# Altium PCB Glove_PCB.PcbDoc
Units mm, origin at the board's own origin, x right, y up, seen from the top; angles counter-clockwise.
Board outline 43.05 x 40.51 mm, 2 copper layers (Top Layer, Bottom Layer); 29 components, 26 nets, 123 pads, 53 vias.
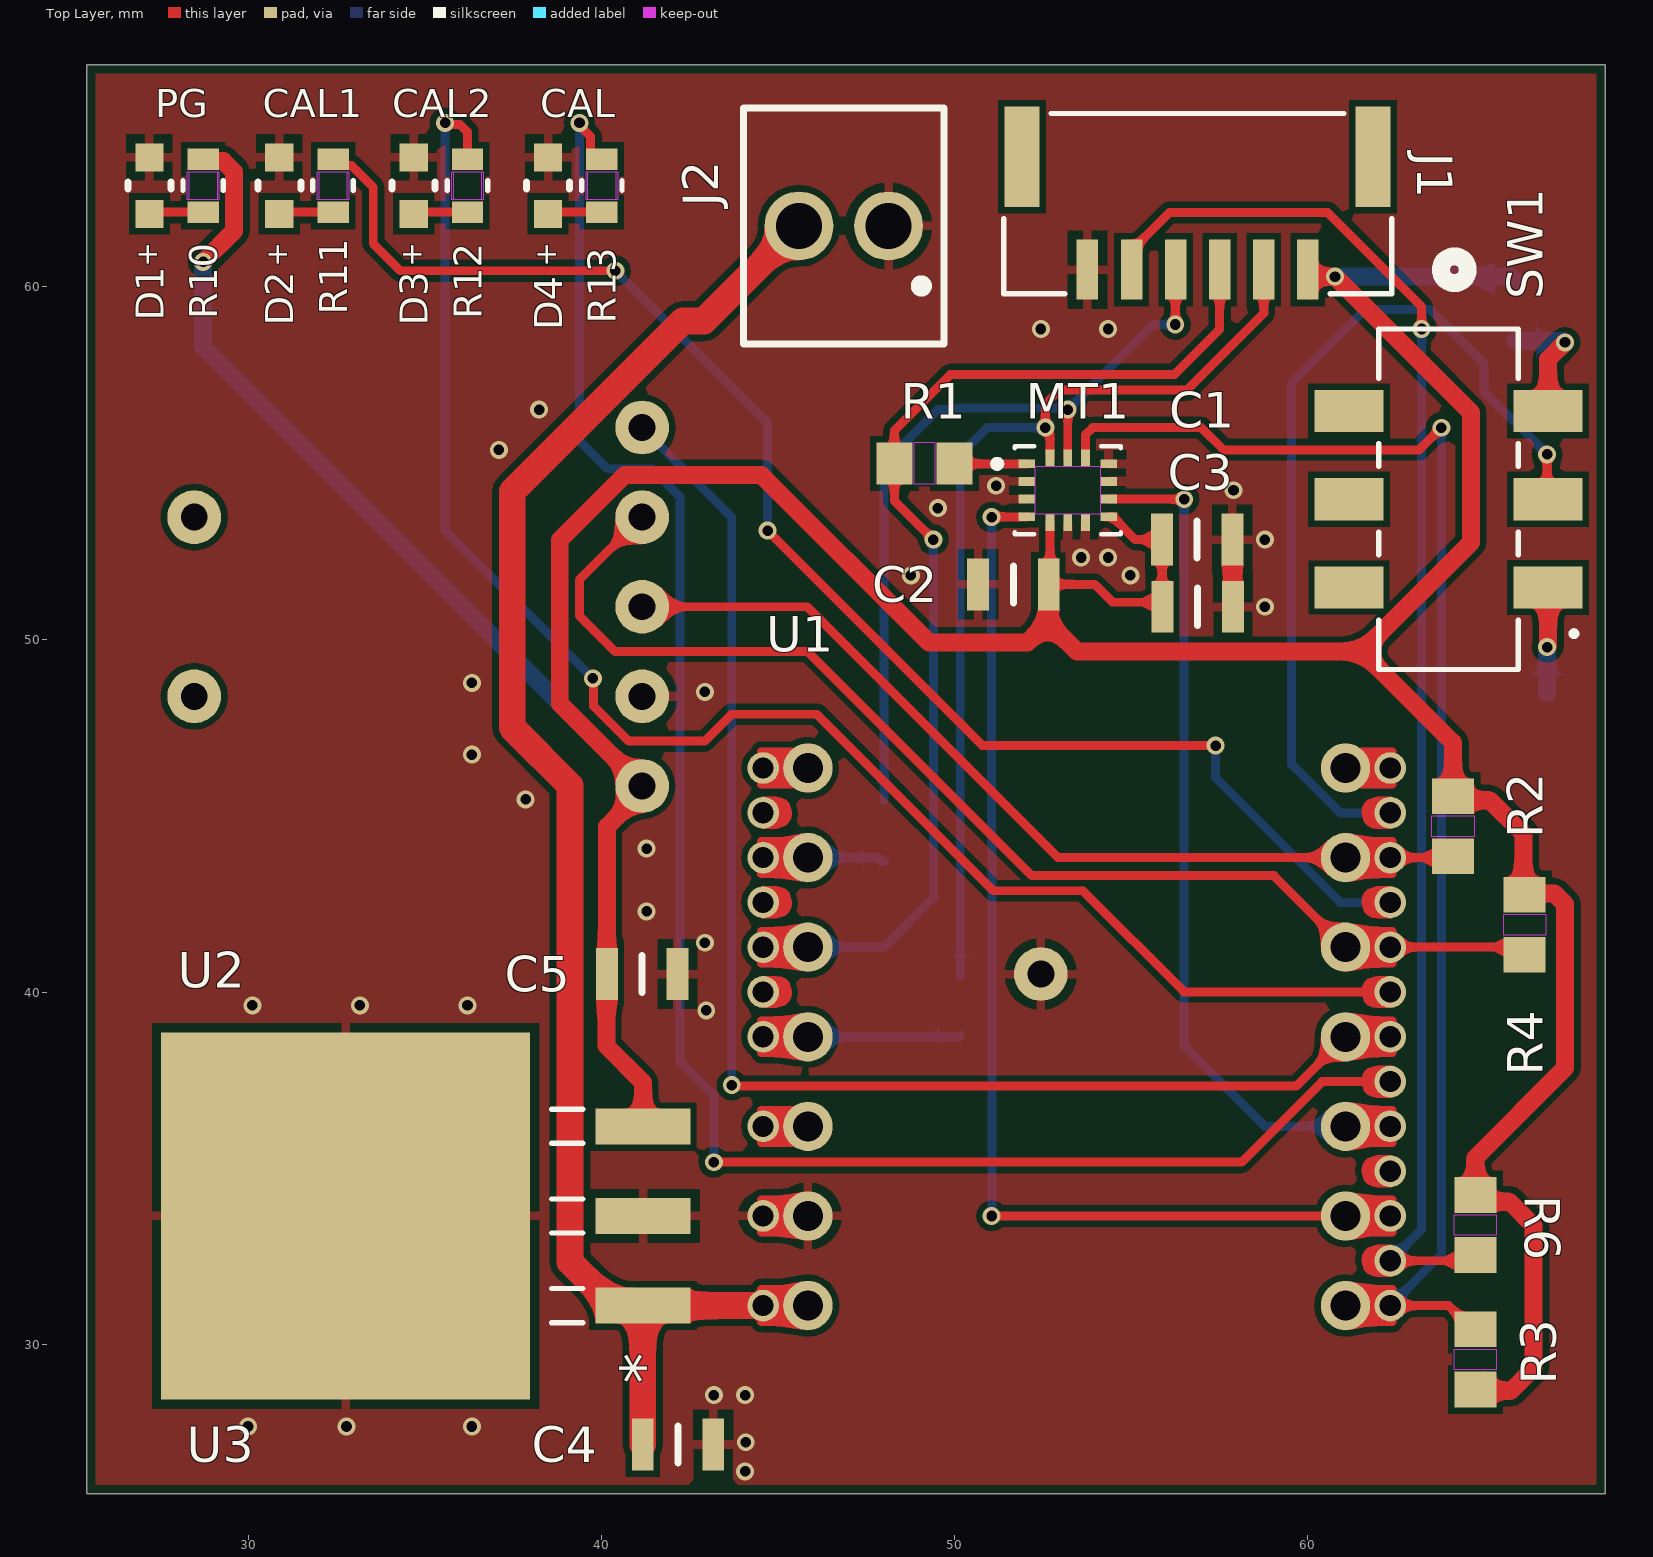
[diagram p0: Top Layer view]
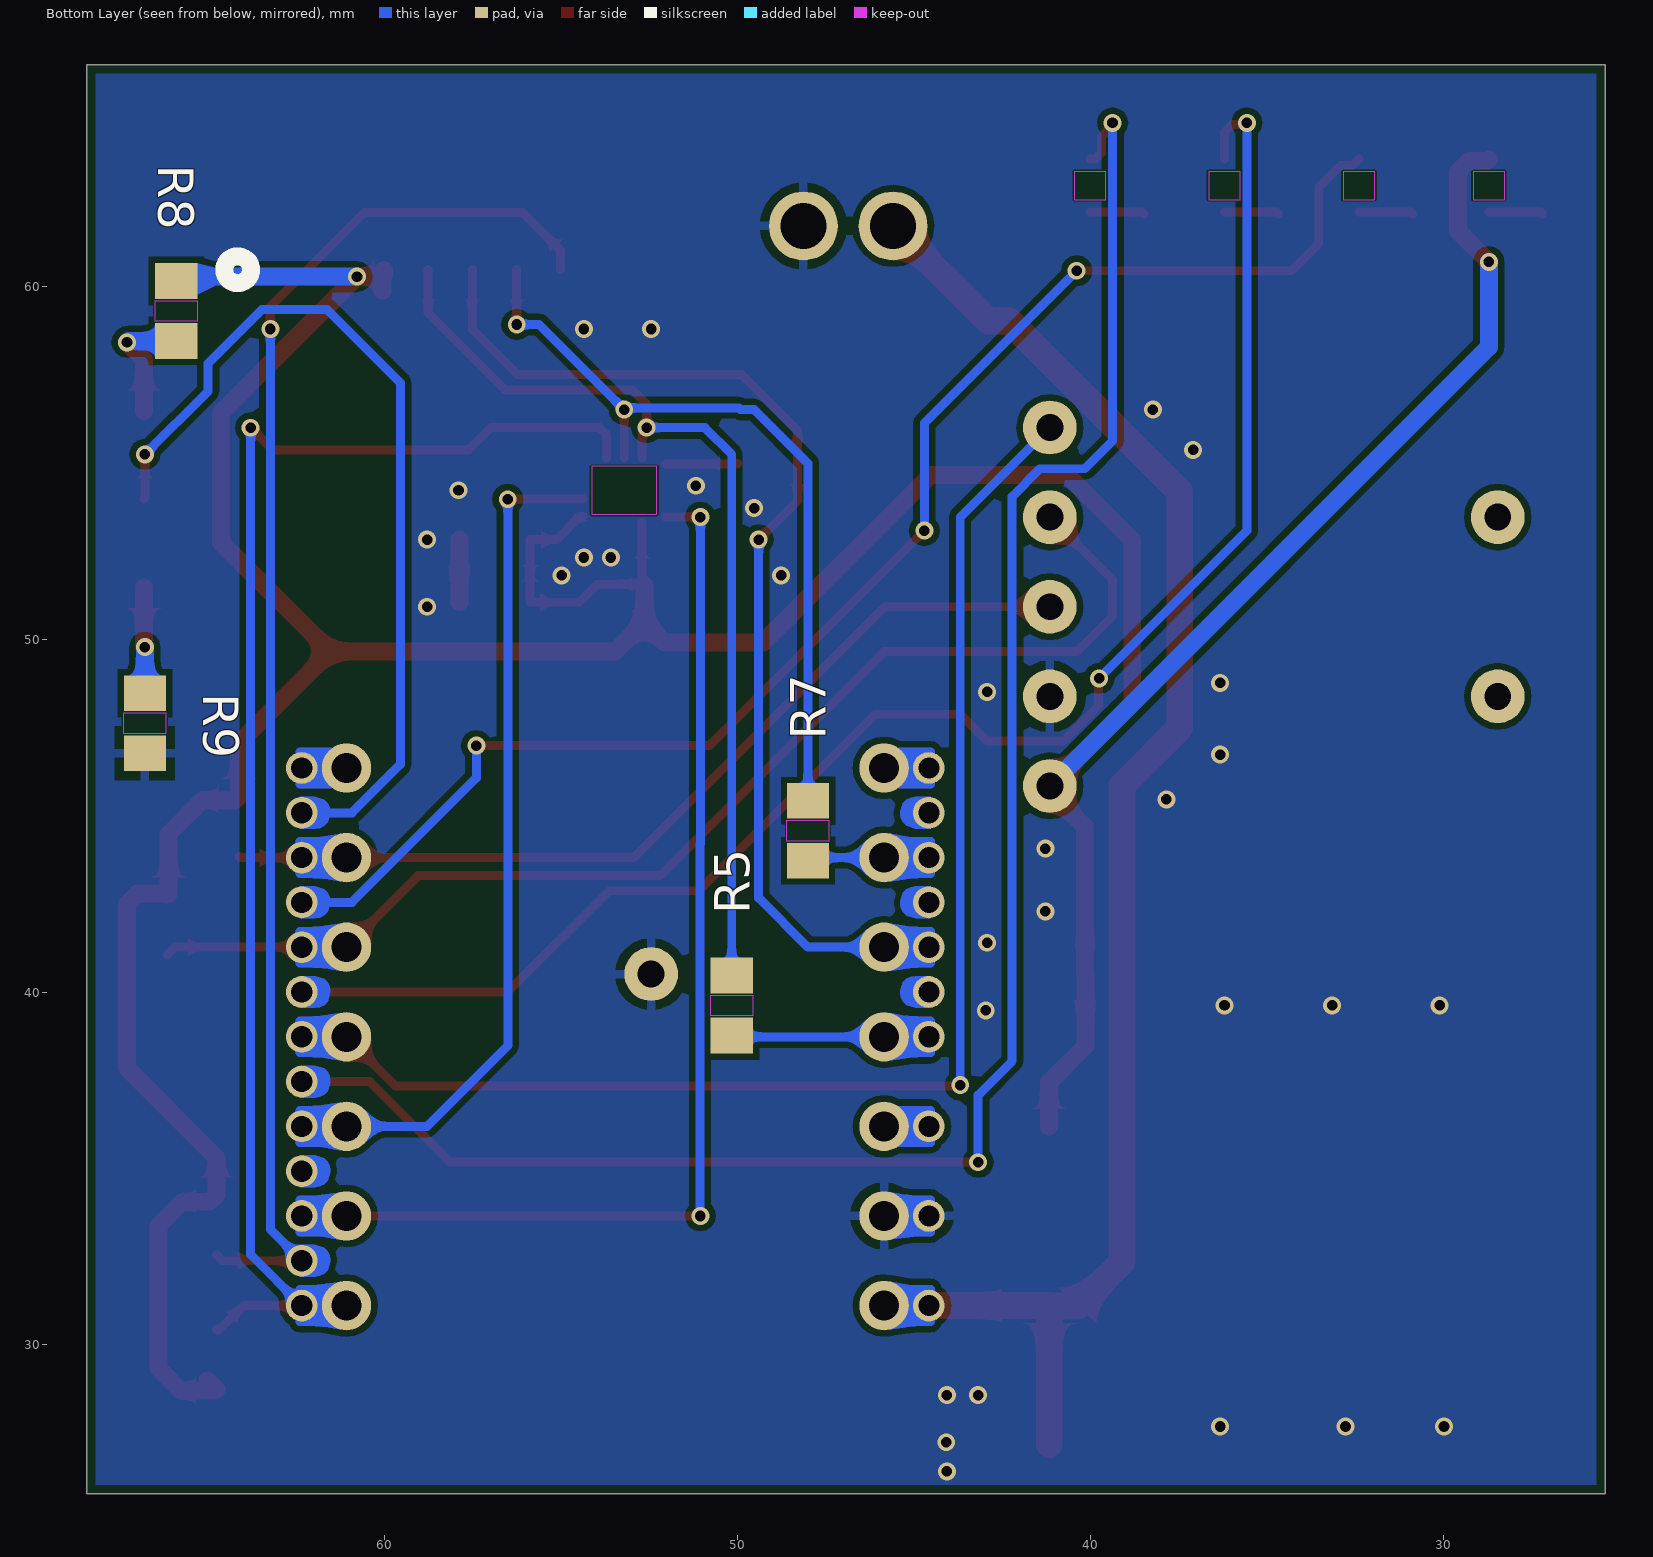
[diagram p1: Bottom Layer view, seen from below]
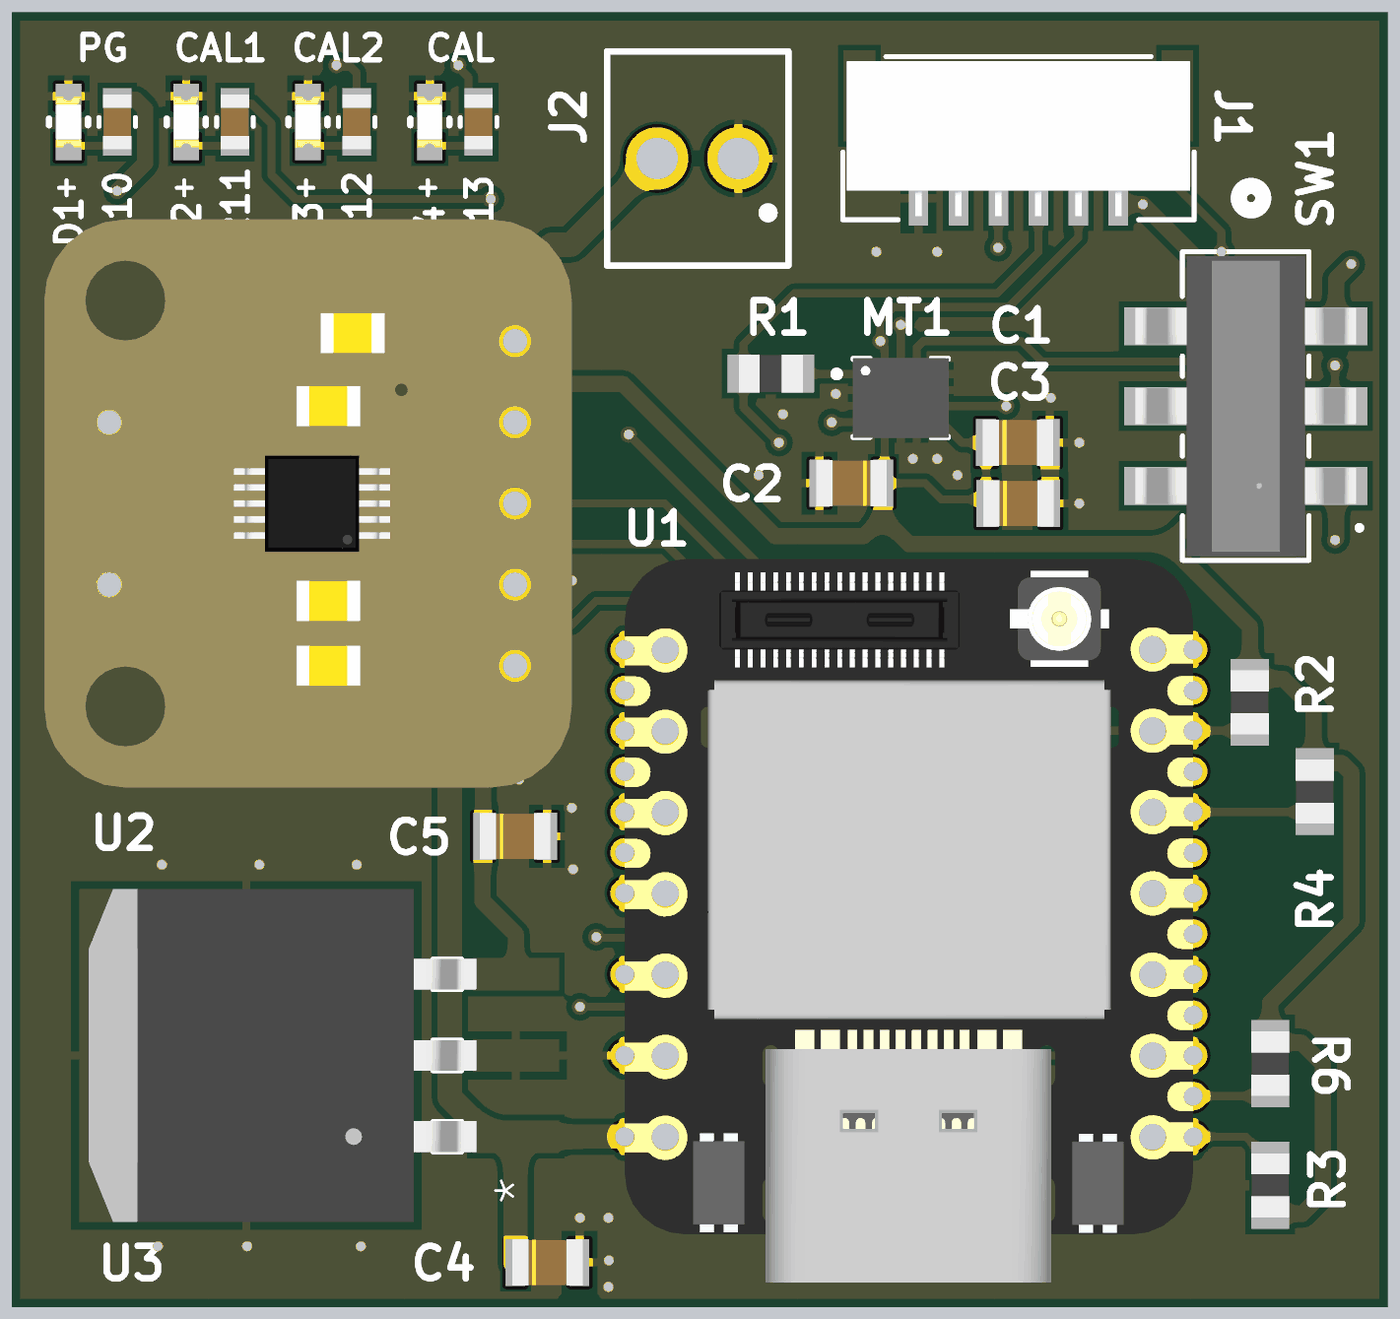
[diagram p2: 3D render of the assembled board from above, using the file's embedded part models]
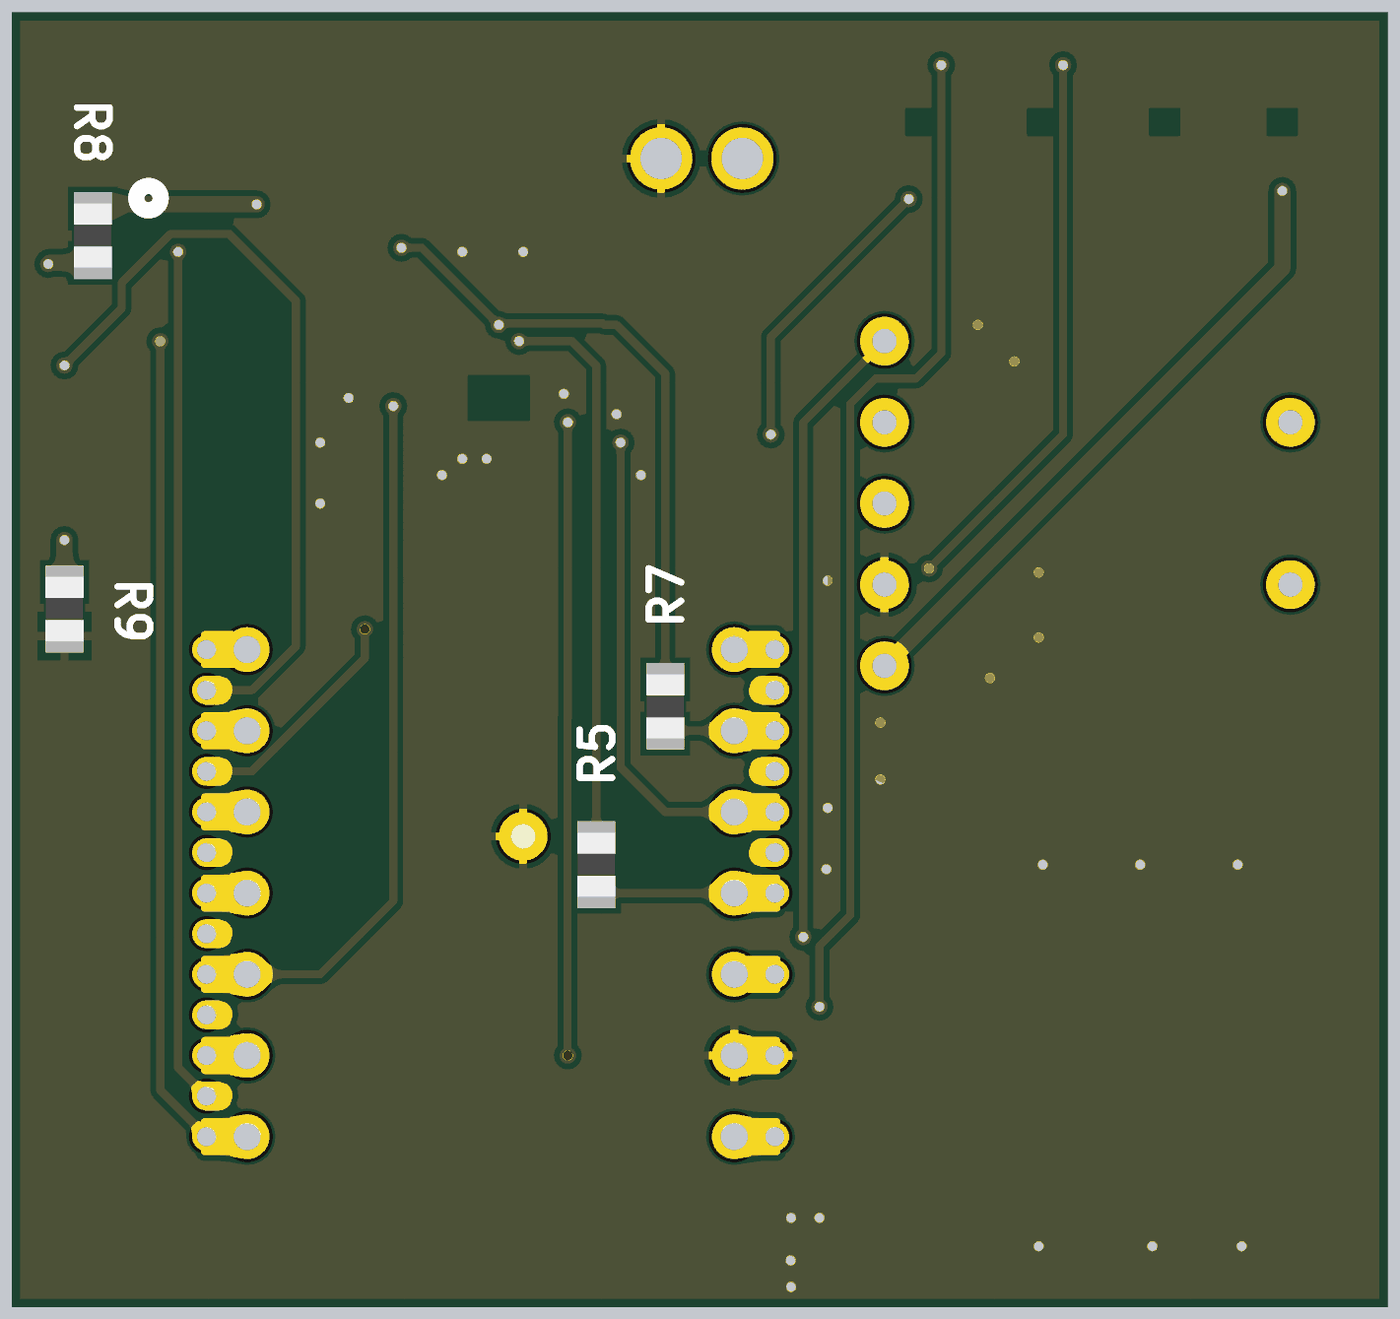
[diagram p3: 3D render of the assembled board from below, using the file's embedded part models]

## Layer stack, top to bottom
Top Solder: solder mask 0.0102, Solder Resist, Dk 3.5
Top Layer: signal copper 0.0356
Dielectric 1: dielectric 0.32, FR-4, Dk 4.8
Bottom Layer: signal copper 0.0356
Bottom Solder: solder mask 0.0102, Solder Resist, Dk 3.5

## Board outline
25.4,25.781 68.453,25.781 68.453,66.294 25.4,66.294

## Design rules (kind name [scope] priority, off if disabled: settings)
BoardOutlineClearance [All] p1: gap=0.254 ignorepadtopadclearanceinfootprint=FALSE
Clearance Clearance_KOL [IsKeepOut] p1: gap=0.051 ignorepadtopadclearanceinfootprint=FALSE
Clearance Clearance_KOL_1 [OnLayer('Keep-Out Layer')] p2: gap=0.051 ignorepadtopadclearanceinfootprint=FALSE
Clearance [All] p3: gap=0.178 ignorepadtopadclearanceinfootprint=FALSE
ComponentClearance ComponentClearance_ESP32 [All vs InComponent('U1')] p1: gap=0 collisioncheckmode=3 verticalgap=0 showdistances=FALSE
ComponentClearance [All] p2: gap=0.254 collisioncheckmode=3 verticalgap=0.254 showdistances=FALSE
MinimumSolderMaskSliver [All] p1: minsoldermaskwidth=0.127
PolygonConnect PolygonConnect_Stitch [isVia and InNet('GND')] p1: connectstyle=Direct reliefconductorwidth=0.254 reliefentries=4 polygonreliefangle="90 Angle" airgapwidth=0.254
PolygonConnect [All] p2: connectstyle=Relief reliefconductorwidth=0.254 reliefentries=4 polygonreliefangle="90 Angle" airgapwidth=0.254
RoutingVias RoutingVias_1 [All] p1: holewidth=0.254 width=0.508 viastyle="Through Hole" minholewidth=0.254 minwidth=0.508 maxholewidth=0.254 maxwidth=0.508 useviatemplates=TRUE viatemplateguid#1={D2CFF177-E9E4-4E6C-970D-245758320712} viatemplatename#1=v51h30m0mx0(Tol8-8)(1)
RoutingVias [All] p2: holewidth=0.3 width=0.508 viastyle="Through Hole" minholewidth=0.254 minwidth=0.508 maxholewidth=0.3 maxwidth=0.508
SilkToSilkClearance [All] p1: silktosilkclearance=0.178
SolderMaskExpansion [All] p1: expansion=0.102 istentingtop=FALSE
Width [All] p1: maxlimit=1.27 minlimit=0.203 preferedwidth=0.254
27 further rules are at their usual default settings.

## Components (designator, comment, footprint, x,y, rotation, side; value= is the part's Value field where it differs from the comment)
C1 "KAM21BR71H104JM" CAPC2012X145N 56.88,52.832 r180 top value=0.1u
C2 "KAM21BR71H104JM" CAPC2012X145N 51.673,51.562 r0 top value=0.1u
C3 "C2012X7R1H225K125AE" CAPC2012X145N 56.896,50.927 r180 top value=2.2u
C4 "GCM21BR71H474KA55K" CAPC2012X145N 42.164,27.178 r180 top value=0.47u
C5 "T58W0476M8R2C0500" CAPC2012X145N 41.148,40.513 r180 top value=47u
D1 "WL-SMCW_0603" WL-SMCW_0603 27.178,62.865 r270 top
D2 "WL-SMCW_0603" WL-SMCW_0603 30.861,62.865 r270 top
D3 "WL-SMCW_0603" WL-SMCW_0603 34.671,62.865 r270 top
D4 "WL-SMCW_0603" WL-SMCW_0603 38.481,62.865 r270 top
J1 "SM06B-GHS-TB" CONN_SM06B-GHS-TB_JST 56.896,62.357 r180 top
J2 "691210910002" 691210910002 46.863,61.722 r180 top
MT1 "ICM-42670-P" XDCR_ICM-42670-P 53.213,54.229 r0 top
R1 "RC0805JR-07100RL" RC0805N_YAG 49.149,54.991 r180 top value=100
R2 "RC0805JR-074K7L" RC0805N_YAG 64.135,44.704 r270 top value=4.7k
R3 "RC0805JR-074K7L" RC0805N_YAG 64.77,29.591 r90 top value=4.7k
R4 "RC0805JR-074K7L" RC0805N_YAG 66.167,41.91 r270 top value=4.7k
R5 "RC0805JR-07100RL" RC0805N_YAG 50.165,39.624 r90 bottom value=100
R6 "RC0805JR-074K7L" RC0805N_YAG 64.77,33.401 r270 top value=4.7k
R7 "RC0805JR-07100RL" RC0805N_YAG 48.006,44.577 r90 bottom value=100
R8 "RC0805JR-074K7L" RC0805N_YAG 65.913,59.309 r270 bottom value=4.7k
R9 "RC0805JR-074K7L" RC0805N_YAG 66.802,47.625 r270 bottom value=4.7k
R10 "RT0603BRD0750RL" RES_RT0603_YAG 28.702,62.865 r90 top value=50
R11 "RT0603BRD0750RL" RES_RT0603_YAG 32.385,62.865 r90 top value=50
R12 "RT0603BRD0750RL" RES_RT0603_YAG 36.195,62.865 r90 top value=50
R13 "RT0603BRD0750RL" RES_RT0603_YAG 40.005,62.865 r90 top value=50
SW1 "SLW-913535-2A-SMT" SLW-913535_CUD 64.008,53.975 r180 top
U1 "ESP32_XIAO" MOUDLE23P-SMD-2.54-21X17.8MM.kicad_mod.kicad_sym 53.467,38.735 r270 top
U2 "ADA_DRV2605L" ADA_DRV2605L 34.671,50.927 r90 top
U3 "LM3940ISX-3.3/NOPB" TS3B 32.893,33.655 r90 top

## Footprints (in the part's own frame and the unit in brackets; to place one, negate y for a bottom-side part, rotate by r counter-clockwise, add the part's x,y. Pads: shape width x height; smd on the part's side, far side on the other; paste and mask are expansions set on the pad)
691210910002 [mm]
  round 1.95 hole 1.3: 1(-1.27,0) 2(1.27,0)
  silkscreen extent -2.84,-3.35 2.84,3.35
ADA_DRV2605L [mil]
  round 60 hole 30: 1(-200,-255) 2(-100,-255) 3(0,-255) 4(100,-255) 5(200,-255) 6(-100,245) 7(100,245)
  body extent -350,-325 350,325, height 105
CAPC2012X145N [mm]
  rect 0.62x1.47 smd: 1(-1,0) 2(1,0)
  silkscreen extent 0,-0.53 0,0.53, body extent -1.1,-0.72 1.1,0.72, height 1.5
CONN_SM06B-GHS-TB_JST [mil]
  rect 24x67 smd paste+0 mask+0: 1(-123.03,73.85) 2(-73.82,73.85) 3(-24.61,73.85) 4(24.61,73.85) 5(73.82,73.85) 6(123.03,73.85)
  rect 39x112 smd paste-56 mask-56: 7(-195.87,-52.14) 8(195.87,-52.14)
  silkscreen extent -302,-101 216,101, body extent -212,-95 212,96, height 167
MOUDLE23P-SMD-2.54-21X17.8MM.kicad_mod.kicad_sym [mm]
  round 1.4 hole 0.85: 1(7.62,7.62) 2(5.08,7.62) 3(2.54,7.62) 4(0,7.62) 5(-2.54,7.62) 6(-5.08,7.62) 7(-7.62,7.62) 9(-5.08,-7.62) 10(-2.54,-7.62) 11(0,-7.62) 12(2.54,-7.62) 13(5.08,-7.62) 14(7.62,-7.62)
  round 0.9 hole 0.6: 1(7.62,8.89) 2(5.08,8.89) 3(2.54,8.89) 4(0,8.89) 5(-2.54,8.89) 6(-5.08,8.89) 7(-7.62,8.89) 8(-7.62,-8.89) 9(-5.08,-8.89) 10(-2.54,-8.89) 11(0,-8.89) 12(2.54,-8.89) 13(5.08,-8.89) 14(7.62,-8.89) 15(6.35,8.89) 16(3.81,8.89) 17(1.27,8.89) 18(-1.27,8.89) 19(-3.81,8.89) 20(-6.35,8.89) 21(-6.35,-8.89) 22(-3.81,-8.89) 23(-1.27,-8.89)
  round 1.4 hole 0.85 mask+0.102: 8(-7.62,-7.62)
  round 1.524 hole 0.762: 24(-1.778,-1.016)
  Top Layer region: -7.168,8.077 -8.072,8.077 -8.072,8.941 -7.168,8.941
  Top Layer region: -7.168,-8.941 -8.072,-8.941 -8.072,-8.077 -7.168,-8.077
  Top Layer region: -4.628,8.077 -5.532,8.077 -5.532,8.941 -4.628,8.941
  Top Layer region: -4.628,-8.941 -5.532,-8.941 -5.532,-8.077 -4.628,-8.077
  Top Layer region: -2.088,8.077 -2.992,8.077 -2.992,8.941 -2.088,8.941
  Top Layer region: -2.088,-8.941 -2.992,-8.941 -2.992,-8.077 -2.088,-8.077
  Top Layer region: 0.452,8.077 -0.452,8.077 -0.452,8.941 0.452,8.941
  Top Layer region: 0.452,-8.941 -0.452,-8.941 -0.452,-8.077 0.452,-8.077
  Top Layer region: 2.992,8.077 2.088,8.077 2.088,8.941 2.992,8.941
  Top Layer region: 2.992,-8.941 2.088,-8.941 2.088,-8.077 2.992,-8.077
  Top Layer region: 5.532,8.077 4.628,8.077 4.628,8.941 5.532,8.941
  Top Layer region: 5.532,-8.941 4.628,-8.941 4.628,-8.077 5.532,-8.077
  Top Layer region: 8.072,8.077 7.168,8.077 7.168,8.941 8.072,8.941
  Top Layer region: 8.072,-8.941 7.168,-8.941 7.168,-8.077 8.072,-8.077
  Top Layer region: -6.196,-8.098 -6.076,-8.159 -5.977,-8.258 -5.898,-8.501 -5.898,-8.941 -6.802,-8.941 -6.802,-8.505 -6.781,-8.375 -6.72,-8.255 -6.621,-8.156 -6.378,-8.077 -6.326,-8.077
  Top Layer region: -5.898,8.505 -5.919,8.375 -5.98,8.255 -6.079,8.156 -6.322,8.077 -6.374,8.077 -6.504,8.098 -6.624,8.159 -6.723,8.258 -6.802,8.501 -6.802,8.941 -5.898,8.941
  Top Layer region: -3.656,-8.098 -3.536,-8.159 -3.437,-8.258 -3.358,-8.501 -3.358,-8.941 -4.262,-8.941 -4.262,-8.505 -4.241,-8.375 -4.18,-8.255 -4.081,-8.156 -3.838,-8.077 -3.786,-8.077
  Top Layer region: -3.358,8.505 -3.379,8.375 -3.44,8.255 -3.539,8.156 -3.782,8.077 -3.834,8.077 -3.964,8.098 -4.084,8.159 -4.183,8.258 -4.262,8.501 -4.262,8.941 -3.358,8.941
  Top Layer region: -1.116,-8.098 -0.996,-8.159 -0.897,-8.258 -0.818,-8.501 -0.818,-8.941 -1.722,-8.941 -1.722,-8.505 -1.701,-8.375 -1.64,-8.255 -1.541,-8.156 -1.298,-8.077 -1.246,-8.077
  Top Layer region: -0.818,8.505 -0.839,8.375 -0.9,8.255 -0.999,8.156 -1.242,8.077 -1.294,8.077 -1.424,8.098 -1.544,8.159 -1.643,8.258 -1.722,8.501 -1.722,8.941 -0.818,8.941
  Top Layer region: 1.722,8.505 1.701,8.375 1.64,8.255 1.541,8.156 1.298,8.077 1.246,8.077 1.116,8.098 0.996,8.159 0.897,8.258 0.818,8.501 0.818,8.941 1.722,8.941
  Top Layer region: 4.262,8.505 4.241,8.375 4.18,8.255 4.081,8.156 3.838,8.077 3.786,8.077 3.656,8.098 3.536,8.159 3.437,8.258 3.358,8.501 3.358,8.941 4.262,8.941
  Top Layer region: 6.802,8.505 6.781,8.375 6.72,8.255 6.621,8.156 6.378,8.077 6.326,8.077 6.196,8.098 6.076,8.159 5.977,8.258 5.898,8.501 5.898,8.941 6.802,8.941
  Top Layer lines w0.254: 8.072,-8.941 7.168,-8.941 7.168,-8.077 8.072,-8.077 8.072,-8.941 ; 5.532,-8.941 4.628,-8.941 4.628,-8.077 5.532,-8.077 5.532,-8.941 ; 2.992,-8.941 2.088,-8.941 2.088,-8.077 2.992,-8.077 2.992,-8.941 ; 0.452,-8.941 -0.452,-8.941 -0.452,-8.077 0.452,-8.077 0.452,-8.941 ; -2.088,-8.941 -2.992,-8.941 -2.992,-8.077 -2.088,-8.077 -2.088,-8.941 ; -4.628,-8.941 -5.532,-8.941 -5.532,-8.077 -4.628,-8.077 -4.628,-8.941 ; -7.168,-8.941 -8.072,-8.941 -8.072,-8.077 -7.168,-8.077 -7.168,-8.941 ; 8.072,8.077 7.168,8.077 7.168,8.941 8.072,8.941 8.072,8.077 ; 5.532,8.077 4.628,8.077 4.628,8.941 5.532,8.941 5.532,8.077 ; 2.992,8.077 2.088,8.077 2.088,8.941 2.992,8.941 2.992,8.077 ; 0.452,8.077 -0.452,8.077 -0.452,8.941 0.452,8.941 0.452,8.077 ; -2.088,8.077 -2.992,8.077 -2.992,8.941 -2.088,8.941 -2.088,8.077 ; -4.628,8.077 -5.532,8.077 -5.532,8.941 -4.628,8.941 -4.628,8.077 ; -7.168,8.077 -8.072,8.077 -8.072,8.941 -7.168,8.941 -7.168,8.077
  Bottom Layer region: -7.168,8.077 -8.072,8.077 -8.072,8.941 -7.168,8.941
  Bottom Layer region: -7.168,-8.941 -8.072,-8.941 -8.072,-8.077 -7.168,-8.077
  Bottom Layer region: -4.628,8.077 -5.532,8.077 -5.532,8.941 -4.628,8.941
  Bottom Layer region: -4.628,-8.941 -5.532,-8.941 -5.532,-8.077 -4.628,-8.077
  Bottom Layer region: -2.088,8.077 -2.992,8.077 -2.992,8.941 -2.088,8.941
  Bottom Layer region: -2.088,-8.941 -2.992,-8.941 -2.992,-8.077 -2.088,-8.077
  Bottom Layer region: 0.452,8.077 -0.452,8.077 -0.452,8.941 0.452,8.941
  Bottom Layer region: 0.452,-8.941 -0.452,-8.941 -0.452,-8.077 0.452,-8.077
  Bottom Layer region: 2.992,8.077 2.088,8.077 2.088,8.941 2.992,8.941
  Bottom Layer region: 2.992,-8.941 2.088,-8.941 2.088,-8.077 2.992,-8.077
  Bottom Layer region: 5.532,8.077 4.628,8.077 4.628,8.941 5.532,8.941
  Bottom Layer region: 5.532,-8.941 4.628,-8.941 4.628,-8.077 5.532,-8.077
  Bottom Layer region: 8.072,8.077 7.168,8.077 7.168,8.941 8.072,8.941
  Bottom Layer region: 8.072,-8.941 7.168,-8.941 7.168,-8.077 8.072,-8.077
  Bottom Layer region: -6.196,-8.098 -6.076,-8.159 -5.977,-8.258 -5.898,-8.501 -5.898,-8.941 -6.802,-8.941 -6.802,-8.505 -6.781,-8.375 -6.72,-8.255 -6.621,-8.156 -6.378,-8.077 -6.326,-8.077
  Bottom Layer region: -5.898,8.505 -5.919,8.375 -5.98,8.255 -6.079,8.156 -6.322,8.077 -6.374,8.077 -6.504,8.098 -6.624,8.159 -6.723,8.258 -6.802,8.501 -6.802,8.941 -5.898,8.941
  Bottom Layer region: -3.656,-8.098 -3.536,-8.159 -3.437,-8.258 -3.358,-8.501 -3.358,-8.941 -4.262,-8.941 -4.262,-8.505 -4.241,-8.375 -4.18,-8.255 -4.081,-8.156 -3.838,-8.077 -3.786,-8.077
  Bottom Layer region: -3.358,8.505 -3.379,8.375 -3.44,8.255 -3.539,8.156 -3.782,8.077 -3.834,8.077 -3.964,8.098 -4.084,8.159 -4.183,8.258 -4.262,8.501 -4.262,8.941 -3.358,8.941
  Bottom Layer region: -1.116,-8.098 -0.996,-8.159 -0.897,-8.258 -0.818,-8.501 -0.818,-8.941 -1.722,-8.941 -1.722,-8.505 -1.701,-8.375 -1.64,-8.255 -1.541,-8.156 -1.298,-8.077 -1.246,-8.077
  Bottom Layer region: -0.818,8.505 -0.839,8.375 -0.9,8.255 -0.999,8.156 -1.242,8.077 -1.294,8.077 -1.424,8.098 -1.544,8.159 -1.643,8.258 -1.722,8.501 -1.722,8.941 -0.818,8.941
  Bottom Layer region: 1.722,8.505 1.701,8.375 1.64,8.255 1.541,8.156 1.298,8.077 1.246,8.077 1.116,8.098 0.996,8.159 0.897,8.258 0.818,8.501 0.818,8.941 1.722,8.941
  Bottom Layer region: 4.262,8.505 4.241,8.375 4.18,8.255 4.081,8.156 3.838,8.077 3.786,8.077 3.656,8.098 3.536,8.159 3.437,8.258 3.358,8.501 3.358,8.941 4.262,8.941
  Bottom Layer region: 6.802,8.505 6.781,8.375 6.72,8.255 6.621,8.156 6.378,8.077 6.326,8.077 6.196,8.098 6.076,8.159 5.977,8.258 5.898,8.501 5.898,8.941 6.802,8.941
  Bottom Layer lines w0.254: 8.072,-8.941 7.168,-8.941 7.168,-8.077 8.072,-8.077 8.072,-8.941 ; 5.532,-8.941 4.628,-8.941 4.628,-8.077 5.532,-8.077 5.532,-8.941 ; 2.992,-8.941 2.088,-8.941 2.088,-8.077 2.992,-8.077 2.992,-8.941 ; 0.452,-8.941 -0.452,-8.941 -0.452,-8.077 0.452,-8.077 0.452,-8.941 ; -2.088,-8.941 -2.992,-8.941 -2.992,-8.077 -2.088,-8.077 -2.088,-8.941 ; -4.628,-8.941 -5.532,-8.941 -5.532,-8.077 -4.628,-8.077 -4.628,-8.941 ; -7.168,-8.941 -8.072,-8.941 -8.072,-8.077 -7.168,-8.077 -7.168,-8.941 ; 8.072,8.077 7.168,8.077 7.168,8.941 8.072,8.941 8.072,8.077 ; 5.532,8.077 4.628,8.077 4.628,8.941 5.532,8.941 5.532,8.077 ; 2.992,8.077 2.088,8.077 2.088,8.941 2.992,8.941 2.992,8.077 ; 0.452,8.077 -0.452,8.077 -0.452,8.941 0.452,8.941 0.452,8.077 ; -2.088,8.077 -2.992,8.077 -2.992,8.941 -2.088,8.941 -2.088,8.077 ; -4.628,8.077 -5.532,8.077 -5.532,8.941 -4.628,8.941 -4.628,8.077 ; -7.168,8.077 -8.072,8.077 -8.072,8.941 -7.168,8.941 -7.168,8.077
  body extent -10.46,-8.89 12.18,8.89, height 4.21
RC0805N_YAG [mil]
  rect 40x47 smd paste+0 mask+0: 1(-33.5,0) 2(33.5,0)
  Top Layer keep-out region: -11.5,-23.5 -11.5,23.5 11.5,23.5 11.5,-23.5
  body extent -39,-24 39,24, height 28
RES_RT0603_YAG [mil]
  rect 24x35 smd paste+0 mask+0: 1(-29.5,0) 2(29.5,0)
  Top Layer keep-out region: -15.5,-15.5 -15.5,15.5 15.5,15.5 15.5,-15.5
  Keep-Out Layer region: -15.5,-17.5 -15.5,17.5 15.5,17.5 15.5,-17.5
  silkscreen extent -5,-22 5,22, body extent -34,-17 34,17, height 22
SLW-913535_CUD [mil]
  rect 77x47 smd paste+0 mask+0: 1(-111.22,98.43) 2(-111.22,0) 3(-111.22,-98.43) 4(111.22,98.43) 5(111.22,0) 6(111.22,-98.43)
  silkscreen extent -143,-190 78,190, body extent -136,-185 136,185, height 217
TS3B [mil]
  rect 40x106 smd paste-53 mask-53: 1(-100,-326) 2(0,-326) 3(100,-326)
  rect 410x412 smd paste-206 mask-206: 4(0,6)
  silkscreen extent -119,-259 119,-224, body extent -205,-278 205,200, height 189
WL-SMCW_0603 [mm]
  rect 0.8x0.8 smd: 1(-0.8,0) 2(0.8,0)
  silkscreen extent -0.1,-0.61 0.1,0.61, body extent -0.8,-0.4 0.8,0.4, height 0.7
XDCR_ICM-42670-P [mm]
  rect 0.475x0.25 smd paste-1 mask+0.051: 1(-1.162,0.75) 2(-1.162,0.25) 3(-1.162,-0.25) 4(-1.162,-0.75) 8(1.162,-0.75) 9(1.162,-0.25) 10(1.162,0.25) 11(1.162,0.75)
  rect 0.25x0.475 smd paste-1 mask+0.051: 5(-0.5,-0.913) 6(0,-0.913) 7(0.5,-0.913) 12(0.5,0.913) 13(0,0.913) 14(-0.5,0.913)
  Keep-Out Layer region: 0.925,-0.675 -0.925,-0.675 -0.925,0.675 0.925,0.675
  silkscreen extent -2.1,-1.25 1.5,1.25, body extent -1.5,-1.25 1.5,1.25, height 0.81

## Part data
C1 C2: "Multilayer Ceramic Chip Capacitors, Capacitance=0.1u", Rated Voltage=50V, Manufacturer_Part_Number=KAM21BR71H104JM
C3: "Multilayer Ceramic Chip Capacitors, Capacitance=2.2u", Rated Voltage=50V, Manufacturer_Part_Number=C2012X7R1H225K125AE
C4: "Multilayer Ceramic Chip Capacitors, Capacitance=0.47u", Rated Voltage=50V, Manufacturer_Part_Number=GCM21BR71H474KA55K
C5: "47 µF Molded Tantalum Polymer Capacitor 8.2 V 0805 (2012 Metric) 500mOhm @ 100kHz", Rated Voltage=8.2V, Manufacturer_Part_Number=T58W0476M8R2C0500
D1 D4: "0603, Yellow Typ.(@20mA): 590nm, 120mcd, 2.0V, 140Â° AlInGaP", Package="0603 Wurth Electronics", Check_prices=https://www.snapeda.com/parts/150060YS75000/Wurth+Electronics/view-part/?ref=eda, MF="Wurth Electronics", MP=150060YS75000, SnapEDA_Link=https://www.snapeda.com/parts/150060YS75000/Wurth+Electronics/view-part/?ref=snap
D2 D3: "0603, Super Red Typ.(@20mA): 630nm, 60mcd, 1.9V, 140Â° AlInGaP", Package="0603 WÃ¼rth Elektronik", Check_prices=https://www.snapeda.com/parts/150060SS75000/Wurth+Electronics/view-part/?ref=eda, MF="Wurth Electronics", MP=150060SS75000, SnapEDA_Link=https://www.snapeda.com/parts/150060SS75000/Wurth+Electronics/view-part/?ref=snap
J1: "No Description Available", Manufacturer_Name=JST, Copyright="Copyright (C) 2025 Ultra Librarian. All rights reserved.", Manufacturer_Part_Number=SM06B-GHS-TB, RefDes=RefDes, Type=Type
J2 MT1: Package=None, Availability=Unavailable, Price=None
  J2: MF="{'manufacturer': u'W\xfcrth Elektronik'}", MP=691210910002
  MT1: MP=ICM-42670-P
R1 R5 R7: "RES 0805 100 5% 1/8W", Manufacturer_Name=Yageo, Tolerance=5%, Manufacturer_Part_Number=RC0805JR-07100RL
R2 R3 R4 R6 R8 R9: "RES 0805 4.7k 5% 1/8W", Manufacturer_Name=Yageo, Tolerance=5%, Manufacturer_Part_Number=RC0805JR-074K7L
R10 R11 R12 R13: "No Description Available", Manufacturer_Name=Yageo, Copyright="Copyright (C) 2025 Ultra Librarian. All rights reserved.", Manufacturer_Part_Number=RT0603BRD0750RL
SW1: "No Description Available", Manufacturer_Name="Same Sky", Copyright="Copyright (C) 2025 Ultra Librarian. All rights reserved.", Manufacturer_Part_Number=SLW-913535-2A-SMT, RefDes=RefDes, Type="Slide Switches"
U3: library part LM3940ISX-3.3NOPB, "1-A, low-dropout voltage regulator for 5-V to 3.3-V conversion 3-DDPAK/TO-263 -40 to 125", Manufacturer_Name="Texas Instruments", Copyright="Copyright (C) 2025 Ultra Librarian. All rights reserved.", Datasheet=https://www.ti.com/lit/gpn/lm3940, Manufacturer_Part_Number=LM3940ISX-3.3/NOPB, RefDes=RefDes, Type=LM3940IS-3.3

## Via types
v1: diameter 0.508, hole 0.3, Top Layer to Bottom Layer, tented both sides, 53 vias

## Nets (pads, with @x,y where several pads share a name; then routed paths per layer and width w, separated by ;. In a path a pad name is that pad's centre, name@x,y a point inside that pad or via, vN(x,y) a via of type N, cw(c..) or ccw(c..) an arc to the next point about the centre after c; other vN are vias at no path point)
3V3: C1.2 C2.2 C3.2 C5.2 J1.1 MT1.5 MT1.8 R2.1 R3.1 R4.1 R6.1 R8.1 R10.2 U2.1 U3.3 | length 126.7
  Top Layer w0.254: MT1.5 52.711,53.315 52.711,51.6 C2.2 53.975,51.562 54.483,51.054 55.88,51.054 55.888,51.062 55.888,52.824 C1.2 55.131,52.832 54.484,53.479 MT1.8
  Top Layer w0.508: v1(28.702,60.706) 29.578,61.582 29.578,63.258 29.273,63.563 28.753,63.563 R10.2 ; U3.3 41.173,37.44 40.132,38.481 40.132,40.497 C5.2 40.148,44.692 41.148,45.692 U2.1 38.811,48.184 38.811,52.818 40.654,54.661 44.526,54.661 49.276,49.911 52.07,49.911 52.644,50.485 ; C2.2 52.644,51.533 52.644,50.485 ; J1.1@60.072,59.884 60.072,60.43 J1.1 60.021,60.338 60.072,60.287 v1(60.79,60.287) 64.643,56.434 64.643,52.75 61.55,49.657 ; R3.1@65.024,28.994 R3.1 64.808,28.702 65.786,28.702 66.421,29.337 66.421,33.378 65.742,34.057 64.965,34.057 R6.1 64.77,35.306 67.31,37.846 67.31,42.501 67.012,42.799 66.205,42.799 R4.1 ; R4.1@66.128,42.8 66.128,44.489 65.182,45.435 64.255,45.435 R2.1 64.135,47.072 61.55,49.657 ; 52.644,50.485 53.471,49.657 61.55,49.657
  Bottom Layer w0.508: v1(28.702,60.706) 28.702,58.293 U2.1 ; v1(60.79,60.287) 65.786,60.287 R8.1
D0: MT1.12 R3.2 U1.1 | length 39.5
  Top Layer w0.254: MT1.12 53.713,55.803 53.917,56.007 56.994,56.007 57.629,55.372 63.174,55.372 v1(63.805,56.002) ; U1.1@62.357,31.115 64.008,31.115 64.681,30.442 R3.2
  Bottom Layer w0.254: U1.1@62.357,31.115 63.805,32.563 v1(63.805,56.002)
D1: MT1.4 U1.2 | length 30.9
  Top Layer w0.254: v1(51.054,33.655) U1.2@61.087,33.655 ; v1(51.054,53.467) 51.064,53.477 52.049,53.477 MT1.4
  Bottom Layer w0.254: v1(51.054,33.655) 51.067,33.668 51.067,44.201 51.054,44.214 v1(51.054,53.467)
D2: MT1.9 U1.3 | length 23.2
  Top Layer w0.254: MT1.9 54.377,53.977 56.513,53.977 v1(56.515,53.975)
  Bottom Layer w0.254: v1(56.515,53.975) 56.515,38.481 58.801,36.195 U1.3@61.087,36.195
D3: U1.4 U2.5 | length 37.7
  Top Layer w0.254: v1(43.688,37.363) 43.713,37.338 59.69,37.338 U1.4@61.087,38.735
  Bottom Layer w0.254: U2.5 43.688,53.467 v1(43.688,37.363)
D11: J1.5 R6.2 U1.15 | length 40.2
  Top Layer w0.254: J1.5 55.021,61.027 56.097,62.103 60.579,62.103 63.246,59.436 v1(63.246,58.801) ; U1.15 64.605,32.385 R6.2
  Bottom Layer w0.254: U1.15 63.246,33.274 v1(63.246,58.801)
D13: R13.2 U1.17 | length 53.3
  Top Layer w0.254: v1(39.37,64.643) 39.37,64.574 39.688,64.257 39.688,63.792 39.865,63.614 R13.2 ; v1(43.18,35.179) 58.142,35.179 60.428,37.465 U1.17
  Bottom Layer w0.254: v1(39.37,64.643) 39.37,55.626 40.157,54.839 41.427,54.839 42.215,54.051 42.215,38.046 43.18,37.081 v1(43.18,35.179)
D14: R12.2 U1.18 | length 46.4
  Top Layer w0.254: v1(35.56,64.643) 35.609,64.594 35.99,64.594 36.195,64.389 R12.2 ; v1(39.751,48.895) 39.766,48.88 39.766,48.118 40.767,47.117 42.921,47.117 43.683,47.879 46.101,47.879 51.105,42.875 53.645,42.875 56.515,40.005 U1.18
  Bottom Layer w0.254: v1(35.56,64.643) 35.56,53.086 v1(39.751,48.895)
D15: R11.2 U1.19 | length 42
  Top Layer w0.254: R11.2 32.563,63.436 32.903,63.436 33.524,62.816 33.524,61.218 34.29,60.452 v1(40.386,60.452) ; v1(44.704,53.086) 50.8,46.99 v1(57.404,46.99)
  Bottom Layer w0.254: v1(40.386,60.452) 44.704,56.134 v1(44.704,53.086) ; v1(57.404,46.99) 57.404,46.077 60.936,42.545 U1.19
GND: C1.1 C2.1 C3.1 C4.1 C5.1 D1.1 D2.1 D3.1 D4.1 J1.6 J2.1 MT1.2 MT1.3 MT1.6 MT1.7 MT1.10 MT1.11 R9.2 U1.13 U1.24 U2.2 U3.2 U3.4 | length 1.8
  Top Layer w0.508: C1.1 57.888,52.824 57.888,51.062 C3.1@57.896,51.054
  other v1: 44.069,26.416 44.085,27.24 29.972,27.686 32.766,27.686 36.322,27.686 43.18,28.575 44.069,28.575 42.965,39.481 30.099,39.624 33.147,39.624 36.195,39.624 42.926,41.402 41.275,42.291 41.275,44.069 37.846,45.466 36.322,46.736 42.926,48.514 36.322,48.768 58.801,50.927 48.768,51.816 54.991,51.816 53.594,52.324 54.356,52.324 58.801,52.832 49.53,53.721 57.912,54.229 51.181,54.356 37.084,55.372 38.227,56.515 52.451,58.801 54.356,58.801
MISO: J1.3 R1.2 U1.10 | length 29.9
  Top Layer w0.254: v1(49.403,52.832) 48.298,53.937 R1.2 48.298,55.918 49.886,57.506 56.236,57.506 57.521,58.791 J1.3
  Bottom Layer w0.254: U1.10@45.847,41.275 48.006,41.275 49.403,42.672 v1(49.403,52.832)
MOSI: J1.2 MT1.14 R5.2 | length 27.6
  Top Layer w0.254: MT1.14 52.713,55.803 52.578,55.938 v1(52.578,56.007) 52.578,56.67 52.982,57.074 56.595,57.074 58.771,59.249 J1.2
  Bottom Layer w0.254: R5.2 50.165,55.245 50.927,56.007 v1(52.578,56.007)
NetD1_2: D1.2 R10.1 | length 1.5
  Top Layer w0.254: D1.2 27.229,62.116 R10.1
NetD2_2: D2.2 R11.1 | length 1.5
  Top Layer w0.254: D2.2 30.912,62.116 R11.1
NetD3_2: D3.2 R12.1 | length 1.5
  Top Layer w0.254: D3.2 34.722,62.116 R12.1
NetD4_2: D4.2 R13.1 | length 1.5
  Top Layer w0.254: D4.2 38.532,62.116 R13.1
NetMT1_1: MT1.1 R1.1 | length 2.1
  Top Layer w0.254: R1.1 50.012,54.979 MT1.1
NetR5_1: R5.1 U1.11 | length 4.3
  Bottom Layer w0.254: U1.11@45.847,38.735 50.127,38.735 R5.1
NetR7_1: R7.1 U1.9 | length 2.2
  Bottom Layer w0.254: U1.9@45.847,43.815 47.841,43.815 47.968,43.688 R7.1
NetR8_2: R8.2 SW1.3 | length 3.6
  Top Layer w0.508: SW1.3 66.833,57.943 v1(67.31,58.42)
  Bottom Layer w0.508: R8.2 67.272,58.458 v1(67.31,58.42)
NetR9_1: R9.1 SW1.1 | length 3
  Top Layer w0.508: v1(66.802,49.784) 66.833,49.815 SW1.1
  Bottom Layer w0.508: R9.1 v1(66.802,49.784)
SCK: J1.4 MT1.13 R7.2 | length 22.4
  Top Layer w0.254: MT1.13 v1(53.213,56.515) ; v1(56.261,58.928) 56.266,58.933 56.266,60.476 J1.4
  Bottom Layer w0.254: R7.2 48.006,54.988 49.533,56.515 49.911,56.515 49.962,56.566 52.809,56.566 52.812,56.564 53.164,56.564 v1(53.213,56.515) 55.626,58.928 v1(56.261,58.928)
SCL: R2.2 U1.6 U2.3 | length 24.7
  Top Layer w0.254: U2.3 45.828,50.927 52.94,43.815 U1.6@61.087,43.815 ; U1.6@62.357,43.815 64.097,43.815 R2.2
SDA: R4.2 U1.5 U2.4 | length 33
  Top Layer w0.254: U2.4 39.37,51.689 39.37,50.673 40.386,49.657 45.847,49.657 52.197,43.307 59.055,43.307 U1.5@61.087,41.275 ; U1.5@62.357,41.275 65.951,41.275 R4.2
SW: SW1.2 U1.20 | length 25.7
  Top Layer w0.254: v1(66.802,55.245) 66.802,54.006 SW1.2
  Bottom Layer w0.254: U1.20 60.936,45.085 59.563,46.458 59.563,57.277 61.646,59.36 63.477,59.36 65.011,57.826 65.011,57.036 v1(66.802,55.245)
VIN: C4.2 J2.2 U1.14 U3.1 | length 43.7
  Top Layer w0.762: C4.2 41.164,31.106 40.345,31.106 39.103,32.347 39.103,45.86 37.465,47.498 37.465,54.192 42.297,59.024 42.895,59.024 J2.2 ; U3.1 U1.14@44.577,31.115
pads on no net: J1.7 J1.8 SW1.4 SW1.5 SW1.6 U1.7 U1.8 U1.12 U1.16 U1.21 U1.22 U1.23 U2.6 U2.7

## Polygon pours and split planes (outlines as drawn)
GND on Top Layer "GND_L01_P000" (solid, remove dead copper, pour order 0): 25.4,25.781 68.453,25.781 68.453,66.294 25.4,66.294
GND on Bottom Layer "GND_L02_P001" (solid, remove dead copper, pour order 1): 25.4,25.781 68.453,25.781 68.453,66.294 25.4,66.294

## Silkscreen, mask and mechanical layers (free items; w line width, h text height)
Top Overlay:
  text "PG" at 27.338,64.803 h0.8
  text "CAL1" at 30.386,64.803 h0.8
  text "CAL2" at 34.069,64.803 h0.8
  text "CAL" at 38.26,64.803 h0.8

## Text inside footprints (layer, text, board x,y; h text height)
D1: Top Overlay "+" at 26.878,61.265 h0.61 r270; Mechanical 13 "+" at 26.878,61.265 h0.61 r270
D2: Top Overlay "+" at 30.561,61.265 h0.61 r270; Mechanical 13 "+" at 30.561,61.265 h0.61 r270
D3: Top Overlay "+" at 34.371,61.265 h0.61 r270; Mechanical 13 "+" at 34.371,61.265 h0.61 r270
D4: Top Overlay "+" at 38.181,61.265 h0.61 r270; Mechanical 13 "+" at 38.181,61.265 h0.61 r270
U3: Top Overlay "*" at 41.808,28.892 h1.27 r90; Mechanical 13 "*" at 41.808,28.892 h1.27 r90